# EAGLE board bitsClassicEdit (EAGLE 7.6.0)
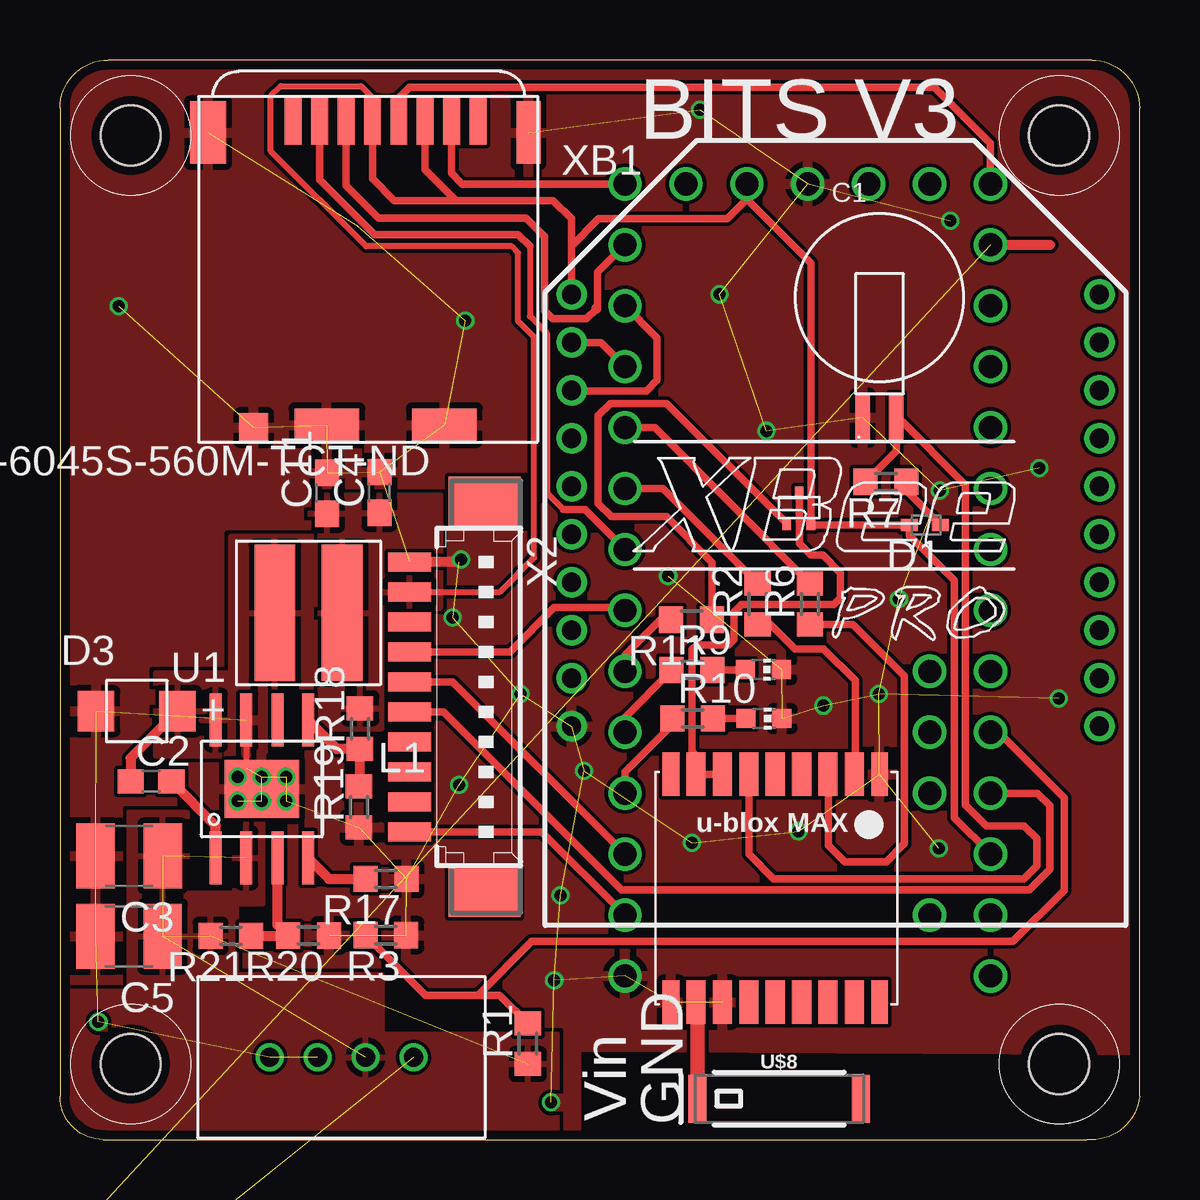
[diagram p0: board, top side]
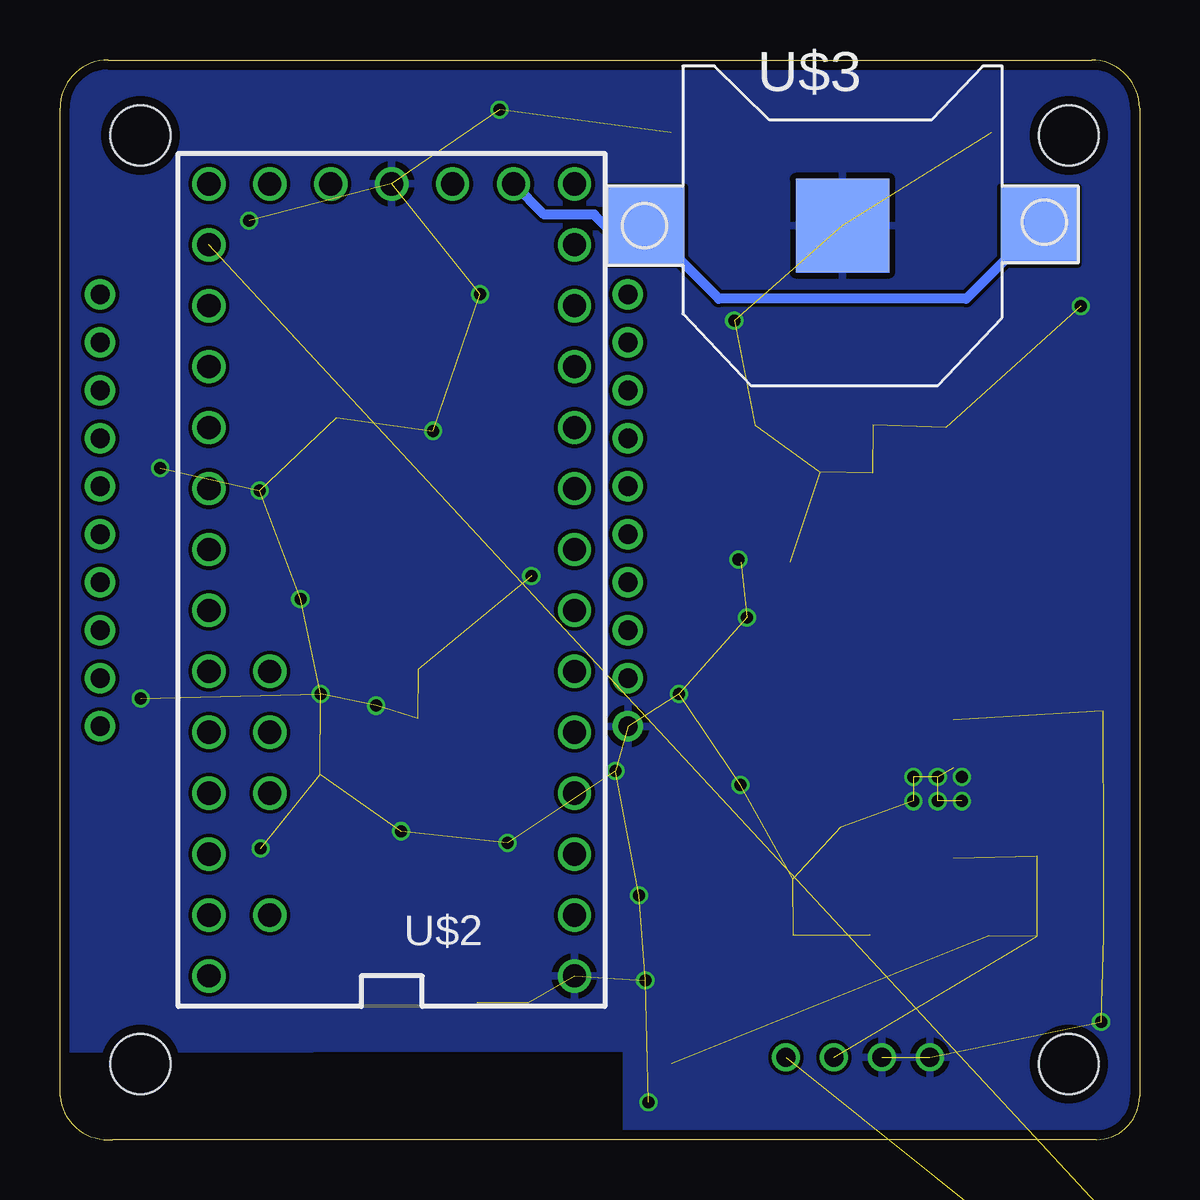
[diagram p1: board, bottom side, seen from below]

Size 45 x 45.01 mm. Coordinates in mm from the lower left corner, seen from the top.
Outline: 1.8,0.01 42.8,0.01 arc90 45,1.81 45,43.01 arc90 43,45.01 2,45.01 arc90 0,43.01 0,1.81 arc90 1.8,0.01
Copper layers (1*16): Top 0.035559375mm / dielectric 1.6mm / Bottom 0.035559375mm
Design rules "oshpark-2layer *": minimum track width 6mil, minimum drill 10mil, track to track 6mil, track to pad 6mil, pad to pad 6mil, via to via 6mil, smd to smd 6mil, copper to edge 15mil, drill to drill 6mil, minimum pad ring 5mil, minimum via ring 5mil, stop-mask expansion 2.5mil, vias tented up to drill 0mil, thermal gap 10mil
Holes 2.5 mm at 2.95,3.16 2.95,41.86 41.65,3.16 41.65,41.86

## Footprints (pad centres in the part's own frame; a part is rotated, then mirrored left to right if it is on the bottom)
ELNASUPERCAP = smd 0.6 x 2: 3V3 0.7,-1.5; GND -0.7,-1.5
C0603 = smd 1.1 x 1: 1 -0.85,0; 2 0.85,0
C1210 = smd 1.6 x 2.7: 1 -1.4,0; 2 1.4,0
SOD523 = smd 0.7 x 0.5: A 0.7,0; C -0.6,0
DO-214AC = smd 1.524 x 1.676: P$1 -1.702,0; P$2 1.702,0
ABRACON = smd 1.7 x 5.7: P$1 1.4,0; P$2 -1.4,0
CHIP-LED0603 = smd 0.8 x 0.8: A 0,-0.75; C 0,0.75
R0603 = smd 1 x 1.1: 1 -0.85,0; 2 0.85,0
SC-75 = smd 0.356 x 0.503: P$1 0.178,0.251; P$2 1.18,0.251; P$3 0.686,1.55
SO8 = smd 0.5 x 2.2: P$1 -1.92,-2.875; P$2 -0.65,-2.875; P$3 0.65,-2.875; P$4 1.92,-2.875; P$5 1.92,2.875; P$6 0.65,2.875; P$7 -0.65,2.875; P$8 -1.92,2.875 | smd 3.1 x 2.4: PAD 0,0
4_PIN_MICROCLASP = drill 0.8: P$1 -1,0; P$2 -3,0; P$3 1,0; P$4 3,0
TEENSY_3.0-3.2&LC_ALL_PINS = drill 0.965: 0 -7.62,13.97; 1 -7.62,11.43; 2 -7.62,8.89; 3 -7.62,6.35; 3.3V 7.62,11.43; 3.3V1 -2.54,-16.51; 4 -7.62,3.81; 5 -7.62,1.27; 6 -7.62,-1.27; 7 -7.62,-3.81; 8 -7.62,-6.35; 9 -7.62,-8.89; 10 -7.62,-11.43; 11 -7.62,-13.97; 12 -7.62,-16.51; 13 7.62,-16.51; 14/A0 7.62,-13.97; 15/A1 7.62,-11.43; 16/A2 7.62,-8.89; 17/A3 7.62,-6.35; 18/A4 7.62,-3.81; 19/A5 7.62,-1.27; 20/A6 7.62,1.27; 21/A7 7.62,3.81; 22/A8 7.62,6.35; 23/A9 7.62,8.89; A10 5.08,6.35; A11 5.08,3.81; AGND 7.62,13.97; AREF 5.08,8.89; GND -7.62,16.51; GND1 0,-16.51; PGM 2.54,-16.51; RESET/DAC 5.08,-16.51; VBAT -5.08,-16.51; VIN 7.62,16.51; VUSB 5.08,13.97
CR1220-SMD = smd 3.2 x 3.2: +$1 -8.2,0; +$2 8.2,0 | smd 3.9 x 3.9: - 0,0
MICRO_SD_HINGED = smd 0.7 x 2: CD -1.1,-13.4; CLK -4.4,-13.4; CMD -2.2,-13.4; DAT0 -6.6,-13.4; DAT1 -7.7,-13.4; DAT2 0,-13.4; VDD -3.3,-13.4; VSS -5.5,-13.4 | smd 2.7 x 1.4: CD1 -1.4,-0.7; GND3 -6.3,-0.7 | smd 1.5 x 2.6: GND1 3.55,-12.9 | smd 1.2 x 1.2: GND2 1.65,-0.6 | smd 1 x 2.6: GND4 -9.8,-12.9
MAX-M8 = smd 1.8 x 0.7: 1_GND 4.95,-4.4; 9_RESET_N 4.95,4.3; 10_GND -4.55,4.3; 18_SAFEBOOT_N -4.55,-4.4 | smd 1.8 x 0.8: 2_TXD 4.95,-3.35; 3_RXD 4.95,-2.25; 4_TIMEPULSE 4.95,-1.15; 5_EXTINT 4.95,-0.05; 6_V_BCKP 4.95,1.05; 7_VCC_IO 4.95,2.15; 8_VCC 4.95,3.25; 11_RF_IN -4.55,3.25; 12_GND -4.55,2.15; 13_LNA_EN -4.55,1.05; 14_VCC_RF -4.55,-0.05; 15_V_ANT/RESERVED -4.55,-1.15; 16_SDA -4.55,-2.25; 17_SCL -4.55,-3.35
SPARKFUN-GPS_ANT-GPS-2X7MM = smd 0.75 x 2: 1 -3.4,0; NC 3.4,0
53398-10 = smd 0.8 x 1.8: 1 5.625,-2.5; 2 4.375,-2.5; 3 3.125,-2.5; 4 1.875,-2.5; 5 0.625,-2.5; 6 -0.625,-2.5; 7 -1.875,-2.5; 8 -3.125,-2.5; 9 -4.375,-2.5; 10 -5.625,-2.5 | smd 2.1 x 3: S1 8.125,0.625; S2 -8.125,0.625
XBEE-PRO = drill 0.8 pad 1.27: 1 -11,9; 2 -11,7; 3 -11,5; 4 -11,3; 5 -11,1; 6 -11,-1; 7 -11,-3; 8 -11,-5; 9 -11,-7; 10 -11,-9; 11 11,-9; 12 11,-7; 13 11,-5; 14 11,-3; 15 11,-1; 16 11,1; 17 11,3; 18 11,5; 19 11,7; 20 11,9

## Placement (x,y rotation side)
C1  [ELNASUPERCAP]  34.16,31.6 0 top
C2  .1 uF  [C0603]  3.8,14.94 0 top
C3  10 uF  [C1210]  2.89,11.84 180 top
C4  .18 uF  [C0603]  13.32,26.98 90 top
C5  2.2 uF  [C1210]  2.88,8.48 180 top
C11  10 uF  [C0603]  11.13,26.95 90 top
D1  [SOD523]  36.1,25.63 180 top
D3  DO-214AC  [DO-214AC]  3.2,17.87 0 top
L1  ASPI-6045S-560M-TCT-ND  [ABRACON]  10.36,21.97 180 top
LED1  Red  [CHIP-LED0603]  29.32,19.6 270 top
LED2  Green  [CHIP-LED0603]  29.35,17.56 270 top
R1  18k  [R0603]  19.5,4.01 90 top
R2  22  [R0603]  29.08,22.34 90 top
R3  10k  [R0603]  13.58,8.53 180 top
R5  [R0603]  -7.82,-13.96 0 top  (outside the outline)
R6  22  [R0603]  31.26,22.34 90 top
R7  22  [R0603]  34.42,27.42 180 top
R9  470  [R0603]  26.35,19.58 0 top
R10  470  [R0603]  26.38,17.56 0 top
R11  100  [R0603]  26.33,21.68 180 top
R17  23.3k  [R0603]  13.59,10.87 180 top
R18  45k  [R0603]  12.5,17.14 90 top
R19  13.3k  [R0603]  12.47,13.88 90 top
R20  39k  [R0603]  10.36,8.51 180 top
R21  195k  [R0603]  7.12,8.5 180 top
T1  SI1013  [SC-75]  30.12,25.43 0 top
U1  LMR16020  [SO8]  8.42,14.62 0 top
U$1  MICROCLASP_4  [4_PIN_MICROCLASP]  11.74,3.44 180 top
U$2  TEENSY_3.1-3.2_ALL_PINS  [TEENSY_3.0-3.2&LC_ALL_PINS]  31.17,23.34 180 bottom
U$3  CR1220SMT  [CR1220-SMD]  12.38,38.1 0 bottom
U$4  MICRO_SD  [MICRO_SD_HINGED]  9.72,29.08 180 top
U$7  MAX-M8  [MAX-M8]  29.77,10.29 90 top
U$8  1.575GHz  [SPARKFUN-GPS_ANT-GPS-2X7MM]  29.98,1.71 0 top
X2  53398-10  [53398-10]  17.08,18.46 270 top
XB1  XBEE-PRO  [XBEE-PRO]  32.32,26.23 0 top

## Library data of the parts
C1 = jmolterLib
C2-C5 C11 R1 R3 R5 R9 R10 R17-R21 = resistor
D1 = diode
D3 U1 = HASP
L1 = inductors
LED1 LED2 = led
R2 R6 R7 R11 = rcl; SPICEPREFIX: R
T1 = cmdLibs
U$1 U$4 = NR_connectors
U$2 = Teensy_3_and_LC_Series_Boards_v1.4
U$3 = adafruit
U$7 = ubloxLib
U$8 = Tracksoar v2 ; PROD_ID: ANT-09087; SF_ID: GPS-09131
X2 = con-molex; MF: MOLEX; MPN: 53398-1071; OC_FARNELL: unknown; OC_NEWARK: 59J0425
XB1 = maxstream; MPN: XBP24-AWI-001; OC_FARNELL: 1337916; OC_NEWARK: 42M2667

## Nets
9_V_RESET_N: U$7.9_RESET_N
+3V3: C4.1 C11.1 D1.A L1.P$2 R18.2 T1.P$2 U$2.3.3V U$2.3.3V1 U$4.VDD U$4.VSS X2.9 XB1.1
+5V: X2.8
A: U$2.16/A2
AGND: U$2.AGND
AREF: U$2.AREF
BAT_CELL1: R1.2 R3.2 U$2.22/A8
C: U$2.A10
CTS: X2.2
DIN: U$2.10 XB1.3
DOUT: U$2.9 XB1.2
FB: R18.1 R19.2 U1.P$5
GND: C1.GND C3.2 C4.2 C5.2 C11.2 D3.P$1 LED1.C LED2.C R3.1 R17.1 R19.1 R20.1 U1.P$7 U1.PAD U$1.P$3 U$1.P$4 U$2.GND U$2.GND1 U$3.- U$4.CD1 U$4.GND1 U$4.GND2 U$4.GND3 U$4.GND4 U$7.1_GND U$7.10_GND U$7.12_GND X2.10 XB1.10
GPSON: R11.2 U$2.4
IN1: C3.1 C5.1 R1.1 R21.2 U1.P$2 U$1.P$1
K: U$2.19/A5
LED1: R9.1 U$2.3
LED2: R10.1 U$2.2
MISO: U$2.12 U$4.DAT0
MOSI: U$2.11 U$4.CMD
N$1: U$7.11_RF_IN U$8.1
N$2: D1.C R7.1
N$3: R6.1 U$7.3_RXD
N$4: R2.1 U$7.2_TXD
N$5: LED2.A R10.2
N$6: LED1.A R9.2
N$7: U$2.17/A3
N$8: U$2.18/A4
N$9: R11.1 T1.P$1
N$10: U$2.A11
N$11: T1.P$3 U$7.7_VCC_IO U$7.8_VCC
N$12: U$2.20/A6
N$13: U$2.21/A7
N$29: R17.2 U1.P$4
N$31: C2.2 U1.P$1
N$33: R5.2 U$1.P$2
N$34: R20.2 R21.1 U1.P$3
NETAV: X2.4
RING: U$2.23/A9 X2.5
RTS: X2.3
RX3: R2.2 U$2.7
RXD: U$2.0 X2.1
SCK: U$2.13 U$4.CLK
SD_CS: U$2.6 U$4.CD
SLEEP: U$2.5 X2.7
SW: C2.1 D3.P$2 L1.P$1 U1.P$8
SWITCH_LED: R5.1 U$2.14/A0
TX3: R6.2 U$2.8
TXD: U$2.1 X2.6
V_BCKP: C1.3V3 R7.2 U$7.6_V_BCKP
VBAT: U$2.VBAT U$3.+$1 U$3.+$2
VIN: U$2.VIN
VUSB: U$2.VUSB

## Tracks (layer width: path | path; a pad name or v marks a point on that pad's centre or on a via)
+3V3
  Top 0.254: X2.9 18.33,22.84 19.76,24.27 19.76,33.46 19.1,34.12 19.1,36.97 18.82,37.25 12.75,37.25 8.79,41.21 8.79,43.52 9.2,43.93 12.55,43.93 13.03,43.44 13.03,42.5 U$4.VDD
  Top 0.305: U$4.VSS 15.22,40.44 16.51,39.15 | 16.51,39.15 20.55,39.15 21.31,38.39 21.31,37.25 | 21.31,37.25 XB1.1 | U$4.VDD 13.02,40.05 13.92,39.15 16.51,39.15 | U$2.3.3V1 28.63,39.21 | 28.63,39.21 27.82,38.39 22.46,38.39 21.31,37.25 | 28.63,39.21 31.3,36.54 T1.P$2 31.35,25.63 D1.A 35.4,25.19 37.29,23.3 37.29,13.41 U$2.3.3V
  Top 0.406: XB1.1
  pour Top: 10.44,26.86 15.85,26.86 15.85,22.16 13.39,22.16 13.39,17.13 10.87,17.13 10.87,25.54 10.44,25.54
BAT_CELL1
  Top 0.305: U$2.22/A8 39.14,16.99 41.86,14.26 41.86,10.4 39.73,8.26 19.66,8.26 17.43,6.03 | 17.43,6.03 16.56,6.03 15.23,6.03 R3.2 | R1.2 18.33,6.03 17.43,6.03
DIN
  Top 0.305: U$2.10 24.89,33.42 24.89,31.66 24.44,31.2 21.36,31.2 XB1.3
DOUT
  Top 0.305: XB1.2 22.55,33.23 U$2.9
FB
  Top 0.406: R19.2 12.5,14.77 R18.1 11.55,16.28 U1.P$5
GND  (via drill 0.5)  (57 unrouted)
  Top 0.254: U1.P$7 7.77,15.5 v7.4,15.13
  Top 0.406: v16.72,24.19 16.61,24.09 X2.10
  other vias: 2.44,34.76 16.89,34.15 27.49,35.24 26.67,42.94 37.11,38.31 40.82,28 36.68,27.06 34.98,22.54 29.44,29.55 25.35,23.5 31.83,18.09 34.14,18.58 36.63,12.15 30.79,12.86 26.34,12.38 21.85,15.38 19.21,18.58 16.36,21.78 16.64,14.79 20.86,10.2 1.6,4.91 20.48,1.56 20.6,6.64 41.63,18.4 8.42,15.13 9.43,15.13 7.4,14.11 8.42,14.11 9.43,14.11
  pour Top (rank 6): -1.05,45.63 46.95,45.63 46.8,3.7 21.52,3.85 21.52,-1.38 -1.2,-1.38
  pour Bottom (rank 6): -2.2,46.28 47.8,46.28 47.52,3.76 21.39,3.82 21.39,-3.22 -2.2,-3.22
GPSON
  Top 0.305: R11.2 25.03,21.68 23.55,20.2 U$2.4
IN1  (5 unrouted)
  pour Top: 7.29,13.22 8.44,13.22 8.44,9.84 7.32,9.84 7.32,6.87 13.41,6.87 13.41,4.4 20.7,4.4 20.7,-0.78 0.21,-0.78 0.21,6.18 2.9,6.18 2.9,13.65 5.29,13.65 5.29,10.27 7.29,10.27
LED1
  Top 0.305: R9.1 25.5,19.56 23.55,17.61 U$2.3
LED2
  Top 0.305: R10.1 25.53,17.3 23.55,15.33 U$2.2
MISO
  Top 0.305: U$4.DAT0 16.32,40.28 16.77,39.84 23.55,39.84 U$2.12
MOSI
  Top 0.305: U$4.CMD 11.92,39.78 13.29,38.41 19.43,38.41 20.2,37.65 20.2,34.55 20.53,34.22 21.95,34.22 22.36,34.63 | 22.36,34.66 22.41,34.71 22.41,36.16 U$2.11
  Top 0.406: 22.36,34.63 22.36,34.66
N$1
  Top 0.61: U$7.11_RF_IN 26.58,5.67 U$8.1
N$2
  Top 0.305: R7.1 35.27,27.06 D1.C
N$3
  Top 0.305: U$7.3_RXD 32.03,15.22 32.03,12.28 32.72,11.59 34.45,11.59 35.21,12.35 35.21,19.34 33.06,21.49 R6.1
N$4
  Top 0.305: R2.1 29.61,21.49 30.64,20.46 31.83,20.46 33.15,19.14 33.15,15.27 U$7.2_TXD
N$5
  Top 0.305: R10.2 LED2.A
N$6
  Top 0.305: R9.2 28.56,19.58 LED1.A
N$9
  Top 0.305: R11.1 27.18,24.07 25.28,25.97 22.99,25.97 22.43,26.53 22.43,30.18 22.94,30.69 25.28,30.69 T1.P$1
N$11
  Top 0.305: T1.P$3 30.81,24.85 31.3,24.37 31.8,24.37 32.54,23.63 32.54,22.59 32.26,22.31 28.4,22.31 28.1,22.01 28.1,20.86 27.87,20.63 26.55,20.63 26.34,20.43 26.34,16.19 26.52,16.02 U$7.8_VCC U$7.7_VCC_IO
N$29
  Top 0.406: U1.P$4 11.21,10.87 R17.2
N$31
  Top 0.406: U1.P$1 6.5,13.09 C2.2
N$33  (1 unrouted)
N$34
  Top 0.406: R21.1 9.5,8.5 R20.2 9.07,8.96 U1.P$3
RING
  Top 0.305: X2.5 15.98,17.84 23.4,10.42 40.41,10.42 41.25,11.26 41.25,13.93 40.74,14.44 38.8,14.44 U$2.23/A9
RX3
  Top 0.305: U$2.7 25.13,27.15 R2.2
RXD
  Top 0.305: X2.1 20.08,12.84 U$2.0
SCK
  Top 0.305: U$4.CLK 14.12,43.41 14.58,43.88 36.45,43.88 38.79,41.54 U$2.13
  Top 0.406: U$2.13
SD_CS
  Top 0.254: 19.59,37.25 19.59,34.32 20.3,33.61 20.3,26.96 20.98,26.27
  Top 0.305: U$4.CD 10.82,40.02 13.11,37.73 19.1,37.73 19.59,37.25 | 20.98,26.27 21.89,26.27 U$2.6
SLEEP
  Top 0.305: X2.7 18.75,20.34 20.6,22.18 23.44,22.18 U$2.5
SW
  Top 0.406: D3.P$2 2.95,15.91 C2.1
  pour Top (rank 2): 6.86,16.04 7.22,16.04 7.22,18.81 10.65,18.81 10.65,25.13 7.12,25.13 7.12,21.85 7.12,19.44 3.99,19.44 3.99,16.01 6.86,16.01
SWITCH_LED  (1 unrouted)
  Top 0.406: U$2.14/A0 41.27,37.31
TX3
  Top 0.305: U$2.8 24.8,29.69 R6.2
TXD
  Top 0.305: X2.6 16.37,19.09 U$2.1
V_BCKP
  Top 0.305: R7.2 34.86,28.71 C1.3V3 34.94,30.1 37.75,27.29 37.75,13.95 38.61,13.09 40.19,13.09 40.72,12.56 40.72,11.41 40.57,11.26 40.21,10.91 40.19,10.88 29.75,10.88 28.72,11.91 U$7.6_V_BCKP
VBAT
  Bottom 0.406: U$3.+$2 7.22,35.06 17.54,35.06 U$3.+$1 22.27,38.1 22.74,38.57 24.82,38.57 U$2.VBAT

## Text on the board
tPlace: BITS V3 | Vin | GND